# Altium PCB GCM_PCB.PcbDoc (part 2 of 2)
Units mm, origin at the board's own origin, x right, y up, seen from the top; angles counter-clockwise.
Board outline 98 x 97 mm, 4 copper layers (Top Layer, GND, Power and signals, Bottom Layer), stack 0.603 mm thick; 110 components, 82 nets, 466 pads, 160 vias.
Unrouted connection lines stored in the file: 67.
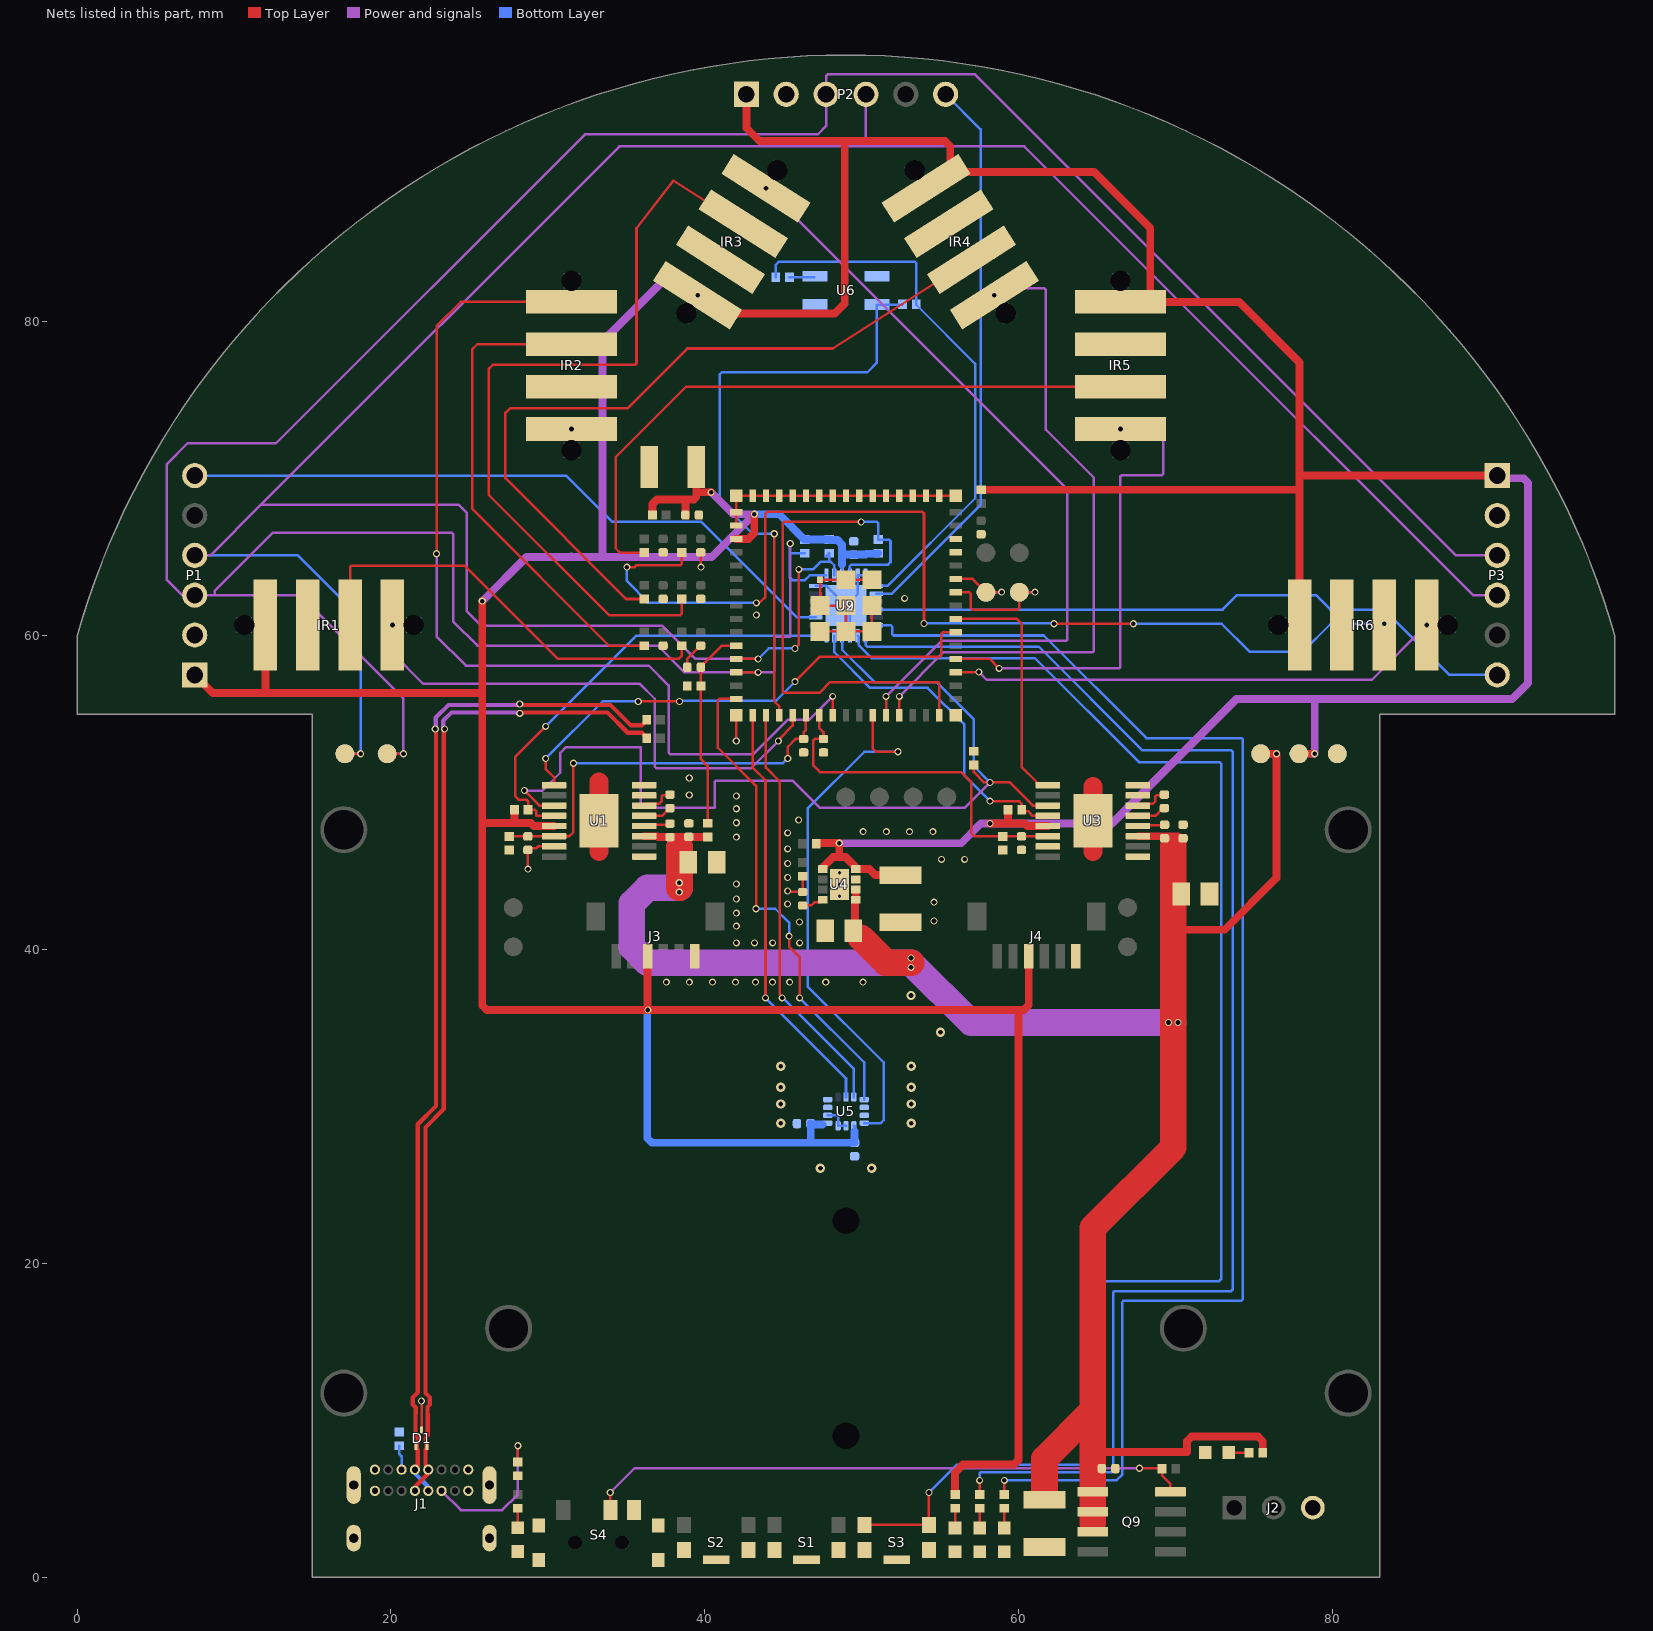
[diagram p4: the nets of this part, all layers, seen from the top]

## Via types
v1: diameter 0.45, hole 0.3, Top Layer to Bottom Layer, 148 vias
v2: diameter 0.6, hole 0.3, Top Layer to Bottom Layer, 12 vias

## Nets (pads, with @x,y where several pads share a name; then routed paths per layer and width w, separated by ;. In a path a pad name is that pad's centre, name@x,y a point inside that pad or via, vN(x,y) a via of type N, cw(c..) or ccw(c..) an arc to the next point about the centre after c; other vN are vias at no path point) (continued)
GND: ?.1@80.306,52.477 C2.1 C3.2 C4.1 C5.1 C6.1 C7.2 C10.2 C11.2 C12.2 C15.2 C16.2 C17.2 C18.2 C19.2 C21.2 C22.2 C23.1 C24.2 C25.2 C26.1 C27.1 C28.2 C30.2 C31.2 C36.2 C37.2 D1.3 D2.C D3.C D4.C D11.C D12.C IR1.2 IR2.2 IR3.2 IR4.2 IR5.2 IR6.2 J1.A1 J1.A12 J1.B1 J1.B12 J1.S1 J1.S2 J1.S3 J1.S4 J2.3 J3.6 J4.6 P1.2 P2.2 P3.2 R2.2 R3.2 R4.2 R12.2 R16.1 R20.2 R28.2 S1.1 S1.4 S1.5 S2.1 S2.4 S2.5 S3.1 S3.4 S3.5 S4.3 S4.4_1 S4.4_2 S4.4_3 S4.4_4 U1.7 U1.9 U1.15 U1.16 U1.17 U2.1 U2.2 U2.42 U2.43 U2.46 U2.47 U2.48 U2.49 U2.50 U2.51 U2.52 U2.53 U2.54 U2.55 U2.56 U2.57 U2.58 U2.59 U2.60 U2.61 U2.61_1 U2.61_2 U2.61_3 U2.61_4 U2.61_5 U2.61_6 U2.61_7 U2.61_8 U2.62 U2.63 U2.64 U2.65 U3.7 U3.9 U3.15 U3.16 U3.17 U4.3 U4.9 U4.10 U4.11 U4.12 U5.2 U5.3 U5.6 U5.7 U5.9 U5.10 U5.11 U6.2 U6.4 U9.9 U9.18 U9.23 U9.24 U9.25 | length 58
  Top Layer w0.16: v1(21.936,11.227) 21.956,11.207 D1.3@21.956,9.392 ; v1(28.74,45.12) 28.734,45.126 28.734,46.342 C36.2@28.729,46.347 28.843,46.461 29.269,46.461 29.38,46.572 U1.7@30.399,46.572 ; C11.2@38.891,57.996 38.891,58.537 39.716,59.362 C10.2@39.746,59.362 ; C19.2@39.746,65.307 39.751,65.302 39.751,64.372 v1(39.756,64.367) ; U2.63@42,54.917 42.006,54.911 v1(42.006,53.287) ; U2.2@42,67.017 U2.1@42,67.867 U2.62@42,68.917 U2.60@43.05,68.917 U2.59@43.9,68.917 U2.58@44.75,68.917 U2.57@45.6,68.917 U2.56@46.45,68.917 U2.55@47.3,68.917 U2.54@48.15,68.917 U2.53@49,68.917 U2.52@49.85,68.917 U2.51@50.7,68.917 U2.50@51.55,68.917 U2.49@52.4,68.917 U2.48@53.25,68.917 U2.47@54.1,68.917 U2.46@54.95,68.917 U2.65@56,68.917 ; v1(45.286,43.727) 45.316,43.697 46.216,43.697 C25.2@46.246,43.667 46.246,44.673 R20.2@46.25,44.677 ; U2.61_7@47.35,60.267 U2.61_6@49,60.267 ; U2.61_4@50.65,61.917 U2.61_5@50.65,60.267 U2.61_6@49,60.267 ; U2.61_3@50.65,63.567 U2.61_2@49,63.567 U2.61_1@47.35,63.567 U2.61_8@47.35,61.917 U2.61@49,61.917 U2.61_6@49,60.267 ; 64.65,50.46 64.731,50.379
  Top Layer w1.2: 33.269,46.243 33.269,50.697 ; 64.731,46.243 64.731,50.379
  Bottom Layer w0.16: U9.18@47.065,63.167 47.75,63.167 U9.25@49,61.917 ; U5.9@47.835,29.437 48.406,29.437 48.5,29.344 U5.7@48.5,28.772 U5.6@49,28.772 ; U9.9@49.25,59.982 49.25,61.667 U9.25@49,61.917 ; U9.24@50.25,63.852 U9.23@49.75,63.852 49.75,62.667 U9.25@49,61.917 ; v1@52.73,62.38 v1(52.74,62.38)
  other v1: 37.55,37.92 39.02,37.92 40.49,37.92 41.96,37.92 43.23,37.92 44.32,37.92 45.41,37.92 47.71,37.92 50.08,37.92 42.01,40.43 43.17,40.43 44.33,40.43 46.046,40.43 42.01,41.49 46.04,41.76 54.61,41.82 42.01,42.32 45.286,42.907 54.61,43.02 42.01,43.22 42.01,44.18 45.286,44.592 45.286,45.488 55.09,45.75 56.56,45.75 45.286,46.417 42.01,47.164 45.286,47.434 50.09,47.51 51.57,47.51 53.05,47.51 54.53,47.51 42.01,48.08 45.98,48.26 42.01,48.97 42.01,49.79 39.01,49.85 39.01,50.93 43.29,61.32
  other v2: 47.37,26.06 50.63,26.06 44.835,28.937 53.165,28.937 44.835,30.157 53.165,30.157 44.835,31.227 53.165,31.227 44.835,32.557 53.165,32.557 55.02,34.73 53.14,37.07
"GPIO 1": R13.2 U9.7 | length 90
  Top Layer w0.16: v1(57.516,6.18) 57.516,5.274 R13.2@57.52,5.27
  Bottom Layer w0.16: U9.7@50.25,59.982 50.25,59.396 50.344,59.302 61.281,59.302 67.872,52.711 73.546,52.711 73.64,52.618 73.64,18.334 73.546,18.24 66.11,18.24 66.017,18.146 66.017,6.794 65.923,6.7 57.61,6.7 57.516,6.606 v1(57.516,6.18)
"GPIO 2": R14.2 U9.6 | length 89.6
  Top Layer w0.16: v1(59.09,6.18) 59.09,5.274 R14.2@59.094,5.27
  Bottom Layer w0.16: U9.6@50.935,60.667 51.851,60.667 51.945,60.574 51.945,60.105 52.039,60.012 61.602,60.012 68.146,53.467 74.196,53.467 74.29,53.374 74.29,17.714 74.196,17.62 66.683,17.62 66.589,17.526 66.589,6.522 66.247,6.18 v1(59.09,6.18)
INT: R26.2 U2.30 U9.22 | length 35.7
  Top Layer w0.16: v1(49.969,67.246) 45.06,67.246 44.966,67.153 44.966,56.451 45.06,56.357 47.299,56.357 47.982,57.04 54.856,57.04 54.95,56.946 U2.30@54.95,54.917
  Bottom Layer w0.16: U9.22@49.25,63.852 49.25,64.439 49.344,64.532 51.681,64.532 51.836,64.687 51.836,66.029 51.742,66.122 R26.2@51.056,66.122 51.056,67.153 50.962,67.246 v1(49.969,67.246)
"INT1 IMU": U2.25 U5.4 | length 34.3
  Top Layer w0.16: U2.25@50.7,54.917 50.7,52.811 50.908,52.602 v1(52.32,52.602)
  Bottom Layer w0.16: U5.4@50.165,28.937 51.218,28.937 51.407,29.126 51.407,32.802 46.553,37.656 46.553,48.982 50.161,52.59 52.29,52.59 v1@52.32,52.56
"IPROPI M1": C17.1 C36.1 R4.1 U1.6 U2.20 | length 25.9
  Top Layer w0.16: R4.1@27.529,47.212 29.266,47.212 29.269,47.215 30.391,47.215 U1.6@30.399,47.222 31.379,47.222 31.63,47.473 v1(31.63,51.87) ; v1(45.287,52.173) 45.287,52.919 45.785,53.417 C17.1@46.296,53.417 46.296,53.837 46.45,53.991 U2.20@46.45,54.917
  Bottom Layer w0.16: v1(31.63,51.87) 31.64,51.86 44.943,51.86 45.256,52.173 v1(45.287,52.173)
"IPROPI M2": C18.1 C37.1 R12.1 U2.21 U3.6 | length 22.6
  Top Layer w0.16: U2.21@47.3,54.917 47.3,54.103 47.566,53.837 C18.1@47.566,53.417 47.022,53.417 46.928,53.324 46.928,51.716 47.338,51.306 56.331,51.306 56.971,50.666 56.971,47.412 57.171,47.212 R12.1@58.983,47.212 ; R12.1@58.968,47.207 C37.1@60.183,47.207 60.19,47.215 61.853,47.215 U3.6@61.861,47.222
"IR1 FLOOR": R22.1 U2.18 U6.3 | length 39.8
  Top Layer w0.16: v1(44.426,66.497) 44.426,55.807 44.75,55.483 U2.18@44.75,54.917
  Bottom Layer w0.16: v1(44.426,66.497) 43.046,66.497 40.95,68.593 40.95,76.63 41.107,76.787 50.367,76.787 50.975,77.395 U6.3@50.975,81.1 52.599,81.1 R22.1@52.606,81.107
"IR 1": IR1.3 R5.1 | length 26.1
  Top Layer w0.16: IR1.3@17.4,62.58 17.4,64.366 17.494,64.46 24.7,64.46 30.62,58.54 38.353,58.54 38.546,58.733 R5.1@38.546,59.357
"IR 2": IR2.3 R10.1 | length 33.1
  Top Layer w0.16: IR2.3@33.41,78.57 29.61,78.57 25.5,78.57 25.17,78.24 25.17,68.094 33.907,59.357 R10.1@36.146,59.357
"IR 3": IR3.3 R17.1 | length 53.6
  Top Layer w0.16: R17.1@38.546,62.343 38.546,61.401 38.452,61.307 33.903,61.307 26.23,68.98 26.23,77 26.49,77.26 35.556,77.26 35.65,77.354 35.65,85.969 38.001,89.003 40.035,87.707 40.599,87.399 40.844,87.265 41.62,86.77 43.273,85.717 IR3.3@44.049,85.223
"IR 4": IR4.3 R18.1 | length 51.2
  Top Layer w0.16: R18.1@36.146,62.338 34.994,62.338 27.29,70.042 27.29,74.19 27.59,74.49 35.08,74.49 38.89,78.3 48.147,78.3 54.636,82.434 55.401,82.946 56.177,83.44 57.83,84.493 IR4.3@58.606,84.987
"IR 5": IR5.3 R54.1 | length 43.7
  Top Layer w0.16: R54.1@36.146,65.297 34.605,65.297 34.33,65.572 34.33,71.38 38.82,75.87 64.59,75.87 IR5.3@68.39,75.87
"IR 6": IR6.3 R55.1 | length 71.7
  Top Layer w0.16: v1@35.106,64.367 35.528,64.367 35.661,64.5 38.452,64.5 38.546,64.594 R55.1@38.546,65.297 ; 43.561,62.16 43.84,62.439 43.84,67.764 43.987,67.91 53.853,67.91 53.97,67.794 v1(53.97,60.78) ; v1(62.26,60.76) v1@67.3,60.76 ; v1@67.301,60.759 v1(67.306,60.76) ; IR6.3@83.3,58.78 v1(83.3,60.76) IR6.3@83.3,62.58
  Bottom Layer w0.16: v1(35.031,64.367) 35.031,63.492 36.428,62.095 v1(43.29,62.095) ; v1@54.02,60.73 v1(53.97,60.78) 62.24,60.78 v1(62.26,60.76) ; v1(67.306,60.76) v1@67.346,60.72 ; v1(67.306,60.76) 72.941,60.76 74.737,58.964 78.094,58.964 79.89,60.76 v1(83.3,60.76) ; v1@83.26,60.72 v1@83.3,60.68
NetC1_1: C1.1 U1.13 | length 1.9
  Top Layer w0.16: U1.13@36.139,48.522 37.264,48.522 37.756,49.014 C1.1@37.786,49.014
NetC1_2: C1.2 U1.14 | length 2.1
  Top Layer w0.16: U1.14@36.139,49.172 36.264,49.297 37.099,49.297 37.246,49.444 37.246,49.753 37.34,49.847 37.759,49.847 C1.2@37.786,49.874
NetC13_1: C13.1 U3.13 | length 1.9
  Top Layer w0.16: U3.13@67.601,48.522 68.726,48.522 69.218,49.014 C13.1@69.248,49.014
NetC13_2: C13.2 U3.14 | length 2.1
  Top Layer w0.16: U3.14@67.601,49.172 67.726,49.297 68.561,49.297 68.708,49.444 68.708,49.753 68.802,49.847 69.221,49.847 C13.2@69.248,49.874
  Top Layer w0.254: C13.2@69.275,49.863 C13.2@69.286,49.874
NetC25_1: C25.1 U4.8 | length 1.4
  Top Layer w0.16: C25.1@46.246,42.807 46.786,42.807 46.986,43.007 47.361,43.007 U4.8@47.526,43.172
NetD2_A: D2.A R11.1 | length 1.3
  Top Layer w0.16: D2.A@55.946,3.14 55.95,3.144 R11.1@55.95,4.4
NetD3_A: D3.A R13.1 | length 1.2
  Top Layer w0.16: D3.A@57.476,3.184 D3.A@57.52,3.14 R13.1@57.52,4.309
NetD4_A: D4.A R14.1 | length 1.3
  Top Layer w0.16: D4.A@59.094,3.14 R14.1@59.094,4.4
NetD11_A: D11.A R56.1 | length 1.3
  Top Layer w0.16: R56.1@28.08,4.4 D11.A@28.08,3.143 D11.A@28.083,3.14
NetD12_A: D12.A R57.1 | length 1.3
  Top Layer w0.16: D12.A@73.4,7.95 73.404,7.946 R57.1@74.688,7.946
NetJ1_A5: J1.A5 R2.1 | length 1.6
  Bottom Layer w0.16: R2.1@20.536,8.382 20.536,7.852 20.681,7.707 J1.A5@20.681,6.857
NetJ1_B5: J1.B5 R3.1 | length 9.9
  Top Layer w0.16: R3.1@28.08,7.34 28.09,7.35 v1(28.09,8.38)
  Power and signals w0.16: J1.B5@23.231,5.507 24.461,4.277 27.088,4.277 28.09,5.28 v1(28.09,8.38)
NetQ9_4: Q9.4 R25.1 S4.2 | length 39
  Top Layer w0.16: v1(33.976,5.397) 33.976,3.965 S4.2@33.983,3.958 ; v1(67.696,6.947) 69.121,6.947 R25.1@69.141,6.928 69.141,6.473 69.671,5.943 Q9.4@69.671,5.442
  Power and signals w0.16: v1(33.976,5.397) 35.526,6.947 v1(67.696,6.947)
NetR21_1: R21.1 U6.1 | length 1.6
  Bottom Layer w0.16: R21.1@45.391,82.847 U6.1@46.972,82.847
"NFAULT M1": R9.1 U1.4 U9.12 | length 29
  Top Layer w0.16: v1(29.862,54.221) 27.918,52.277 27.918,49.794 28.175,49.537 28.647,49.537 28.741,49.444 R9.1@28.741,48.897 29.177,48.897 29.271,48.804 29.271,48.522 U1.4@30.399,48.522
  Bottom Layer w0.16: v1(29.862,54.221) 35.623,59.982 U9.12@47.75,59.982
"NFAULT M2": R15.1 U3.4 U9.11 | length 21.1
  Top Layer w0.16: v1(58.181,49.456) 60.023,49.456 60.193,49.286 R15.1@60.193,48.897 60.29,48.801 60.619,48.801 60.898,48.522 U3.4@61.861,48.522
  Bottom Layer w0.16: U9.11@48.25,59.982 48.25,58.956 50.529,56.677 54.204,56.677 56.546,54.336 56.546,51.091 v1(58.181,49.456)
NSLEEP: R16.2 U1.3 U3.3 U9.10 | length 62.3
  Top Layer w0.16: v1(28.502,50.133) 29.463,49.172 U1.3@30.399,49.172 ; R16.2@57.148,51.764 57.148,51.305 57.803,50.649 v1(58.181,50.649) ; v1@58.196,50.649 59.438,50.649 60.915,49.172 U3.3@61.861,49.172
  Power and signals w0.16: v1(28.502,50.133) 29.657,50.133 30.791,51.267 30.791,52.533 31.16,52.902 35.925,52.902 35.925,49.155 36.05,49.03 40.631,49.03 40.631,50.677 40.725,50.771 45.593,50.771 47.334,49.03 56.562,49.03 v1(58.181,50.649)
  Bottom Layer w0.16: U9.10@48.75,59.982 48.75,59.103 50.815,57.037 54.773,57.037 57.148,54.662 57.148,51.682 v1(58.181,50.649)
"ON/OFF IR 1": IR1.4 U2.19 | length 34.6
  Top Layer w0.16: v1@44.69,53.36 45.6,54.27 U2.19@45.6,54.917
  Power and signals w0.16: v1(20.1,60.68) 20.1,58.888 22.061,56.927 35.866,56.927 36.813,55.98 36.813,51.654 36.906,51.56 42.963,51.56 v1(44.69,53.287)
"ON/OFF IR 2": IR2.4 U2.22 | length 64.5
  Top Layer w0.16: v1(22.91,65.22) 22.91,79.73 24.45,81.27 29.61,81.27 IR2.4@33.41,81.27 ; U2.22@48.15,54.917 v1@48.15,56.1
  Power and signals w0.16: v1(22.91,65.22) 22.91,59.96 24.773,58.097 36.433,58.097 37.7,56.83 37.7,52.544 37.794,52.45 43.095,52.45 45.275,54.63 46.643,54.63 v1(48.15,56.137)
"ON/OFF IR 3": IR3.4 U2.26 | length 54.8
  Top Layer w0.16: IR3.4@42.295,89.542 43.071,89.047 v1(43.898,88.521) 44.724,87.994 IR3.4@45.5,87.5 ; U2.26@51.55,54.917 v1(51.55,56.137)
  Power and signals w0.16: v1(43.898,88.521) 63.11,69.308 63.11,59.764 63.016,59.67 55.083,59.67 v1(51.55,56.137)
"ON/OFF IR 4": IR4.4 U2.27 | length 46.4
  Top Layer w0.16: U2.27@52.4,54.917 v1(52.4,56.137) ; IR4.4@56.852,80.669 57.628,81.163 v1(58.455,81.689) 59.281,82.216 IR4.4@60.057,82.71
  Power and signals w0.16: v1(52.4,56.137) 55.193,58.93 64.706,58.93 64.8,59.024 64.8,70.064 61.73,73.134 61.73,82.034 61.636,82.128 58.893,82.128 v1(58.455,81.689)
"ON/OFF IR 5": IR5.4 U2.34 | length 35
  Top Layer w0.16: U2.34@56,58.517 58.163,58.517 v1(58.76,57.92) ; IR5.4@64.59,73.17 v1(66.49,73.17) IR5.4@68.39,73.17
  Power and signals w0.16: v1(58.76,57.92) 66.396,57.92 66.49,58.014 66.49,70.148 66.575,70.233 69.128,70.233 69.222,70.327 69.222,73.076 69.128,73.17 v1(66.49,73.17)
"ON/OFF IR 6": IR6.4 U2.33 | length 35.4
  Top Layer w0.16: U2.33@56,57.667 57.417,57.667 v1@57.43,57.68 ; IR6.4@86,58.78 v1(86,60.68) IR6.4@86,62.58
  Power and signals w0.16: v1(57.468,57.68) 57.968,57.18 82.5,57.18 v1(86,60.68)
"ON/OFF IR FLOOR": R21.2 R22.2 U9.1 | length 35
  Bottom Layer w0.16: R21.2@44.521,82.847 44.521,83.631 44.726,83.836 53.382,83.836 53.476,83.742 R22.2@53.476,81.107 53.476,81.087 57.238,77.325 57.238,68.758 51.647,63.167 U9.1@50.935,63.167
"PWM M1": U1.1 U2.36 | length 32.2
  Top Layer w0.16: v1(29.862,52.173) 29.862,51.517 30.399,50.98 U1.1@30.399,50.472 ; v1@35.763,55.86 35.794,55.829 38.371,55.829 v1(38.39,55.81) ; v1(45.756,57.067) 47.353,58.664 54.989,58.664 55.083,58.758 55.083,60.124 55.176,60.217 U2.36@56,60.217
  Bottom Layer w0.16: v1(29.862,52.173) 33.499,55.81 v1(35.763,55.81) ; v1(38.39,55.81) 38.445,55.866 44.554,55.866 45.736,57.047 v1@45.736,57.067
"PWM M2": U2.37 U3.1 | length 15.6
  Top Layer w0.16: U2.37@56,61.067 59.893,61.067 60.19,60.77 60.19,51.63 61.156,50.664 61.156,50.597 61.281,50.472 U3.1@61.861,50.472
RX: ?.1@57.92,62.77 U2.40 | length 4.3
  Top Layer w0.16: U2.40@56,63.617 57.073,63.617 ?.1@57.92,62.77 v1(58.92,62.77)
  Bottom Layer w0.16: ?.1@57.92,62.77 v1(58.92,62.77)
SCL: ?.1@19.76,52.477 P1.3 P2.3 P3.3 R27.2 U2.13 U9.19 | length 201.5
  Top Layer w0.16: ?.1@19.76,52.477 v1(20.8,52.477) ; U2.13@42,57.667 v1@43.396,57.667
  Power and signals w0.16: v1(20.8,52.477) 20.8,55.99 14.21,62.58 8.77,62.58 ; v1(45.446,65.877) 45.446,59.923 45.451,59.917 44.426,59.917 44.426,57.761 44.332,57.667 v1(43.406,57.667) 38.7,57.667 37.005,59.362 25.508,59.362 23.97,60.9 23.97,66.476 23.876,66.57 12.49,66.57 8.77,62.85 8.77,62.58 ; P3.3@90.5,65.12 87.88,65.12 57.23,95.77 47.824,95.77 47.73,95.676 P2.3@47.73,94.5 47.73,92.48 47.2,91.95 32.36,91.95 12.67,72.26 7.051,72.26 5.729,70.938 5.729,63.541 6.69,62.58 8.77,62.58
  Bottom Layer w0.16: ?.1@19.76,52.477 v1(20.8,52.477) ; v1(45.446,65.877) 45.426,65.857 45.426,65.252 ; R27.2@46.376,65.252 45.426,65.252 ; U9.19@47.75,63.852 46.701,63.852 46.385,63.536 45.587,63.536 45.426,63.697 45.426,65.252
SCLK: U2.16 U5.13 | length 26.8
  Top Layer w0.16: U2.16@43.05,54.917 43.05,51.61 43.87,50.79 v1(43.87,36.92)
  Bottom Layer w0.16: v1(43.87,36.92) 49,31.79 U5.13@49,30.602
SDA: ?.1@17.07,52.477 P1.4 P2.4 P3.4 R30.1 U2.12 U9.20 | length 184.5
  Top Layer w0.16: ?.1@17.07,52.477 v1(18.07,52.477) ; U2.12@42,58.517 v1(43.406,58.517) ; v1(45.756,59.187) 45.756,59.211 45.996,59.451 v1(45.996,64.227)
  Power and signals w0.16: P1.4@7.5,65.12 8.5,65.12 11.73,68.35 ; v1(43.406,58.517) 39.406,58.517 37.281,60.642 25.748,60.642 24.84,61.55 24.84,67.81 24.3,68.35 11.73,68.35 ; P2.4@50.27,94.5 50.27,91.196 50.286,91.18 ; P3.4@90.5,62.58 88.957,62.58 68.707,82.83 60.357,91.18 50.286,91.18 ; 11.73,68.35 34.56,91.18 50.286,91.18
  Bottom Layer w0.16: P1.4@7.5,65.12 14.07,65.12 18.07,61.12 v1(18.07,52.477) ?.1@17.07,52.477 ; v1(43.406,58.517) 44.076,59.187 v1(45.756,59.187) ; v1(45.996,64.227) 46.906,64.227 46.922,64.243 46.927,64.243 47.406,64.722 47.936,64.722 ; R30.1@47.716,65.052 47.916,65.252 R30.1@47.936,65.252 47.936,64.722 ; U9.20@48.25,63.852 48.25,64.49 48.018,64.722 47.936,64.722
SDI: U2.17 U5.14 | length 26.6
  Top Layer w0.16: U2.17@43.9,54.917 43.9,53.42 43.897,53.417 43.897,51.595 44.78,50.712 44.78,37.15 44.931,36.998 v1(44.931,36.92)
  Bottom Layer w0.16: v1@44.956,36.942 49.5,32.398 U5.14@49.5,30.602
SDO: U2.15 U5.1 | length 31.2
  Top Layer w0.16: U2.15@42,55.967 40.924,55.967 40.83,55.874 40.83,52.867 43.27,50.427 v1@43.27,42.6 ; v1(45.38,40.85) 45.38,40.2 46.05,39.53 v1(46.05,36.92)
  Bottom Layer w0.16: v1(43.26,42.6) 44.491,42.6 45.38,41.711 v1(45.38,40.85) ; v1(46.05,36.92) 50.165,32.805 U5.1@50.165,30.437
SWITCH: S3.2 S3.3 U9.8 | length 96.8
  Top Layer w0.16: S3.3@50.183,3.332 S3.2@54.283,3.332 v1(54.283,5.397)
  Bottom Layer w0.16: U9.8@49.75,59.982 49.805,59.927 49.805,59.403 50.633,58.575 61.028,58.575 67.665,51.938 72.806,51.938 72.9,51.845 72.9,19 72.77,18.87 65.538,18.87 65.444,18.776 65.444,7.274 65.351,7.18 56.066,7.18 v1(54.283,5.397)
TX: ?.1@60.05,62.77 U2.39 | length 8.1
  Top Layer w0.16: U2.39@56,62.767 56.856,62.767 56.95,62.674 56.95,61.761 57.044,61.667 59.956,61.667 60.05,61.761 ?.1@60.05,62.77 v1(61.05,62.77)
  Bottom Layer w0.16: ?.1@60.05,62.77 v1(61.05,62.77)
USB_N: D1.2 J1.A7 J1.B7 R7.1 | length 64.3
  Top Layer w0.27: J1.B7@21.531,5.507 21.6,5.576 21.6,5.83 22.312,6.542 22.312,6.788 J1.A7@22.381,6.857 22.381,6.954 22.203,7.133 22.203,8.119 22.261,8.177 22.261,8.307 D1.2@22.306,8.352 22.261,8.398 22.261,8.528 22.203,8.585 22.203,8.906 22.351,9.055 22.351,10.4 22.331,10.42 22.331,10.851 22.481,11.001 22.481,11.453 22.203,11.732 22.203,28.664 23.372,29.833 23.372,53.997 v1(23.425,54.05) ; v1(28.21,55.05) 28.244,55.084 28.441,55.084 28.47,55.113 33.794,55.113 35.093,53.814 35.996,53.814 R7.1@36.166,53.644
  Top Layer w0.291: R7.1@36.166,53.644 36.166,53.587 R7.1@36.301,53.452
  Power and signals w0.27: v1(23.425,54.05) 23.425,54.099 23.333,54.191 23.333,54.584 23.862,55.113 28.147,55.113 v1(28.21,55.05)
USB_P: D1.1 J1.A6 J1.B6 R8.1 | length 65.1
  Top Layer w0.27: J1.A6@21.531,6.857 21.531,6.954 21.709,7.133 21.709,8.119 21.651,8.177 21.651,8.307 D1.1@21.606,8.352 21.651,8.398 21.651,8.528 21.709,8.585 21.709,8.906 21.561,9.055 21.561,10.4 21.581,10.42 21.581,10.811 21.391,11.001 21.391,11.453 21.709,11.772 21.709,28.868 22.878,30.037 22.878,53.997 v1(22.825,54.05) ; v1(28.21,55.65) 28.244,55.616 28.441,55.616 28.47,55.587 33.99,55.587 35.292,54.285 35.996,54.285 R8.1@36.166,54.455
  Top Layer w0.291: R8.1@36.166,54.455 36.166,54.513 R8.1@36.301,54.647
  Power and signals w0.27: v1(22.825,54.05) 22.859,54.084 22.859,54.211 22.859,54.781 23.666,55.587 28.147,55.587 v1(28.21,55.65)
  Bottom Layer w0.27: J1.A6@21.531,6.857 21.6,6.788 21.6,6.542 22.312,5.83 22.312,5.576 J1.B6@22.381,5.507
"V METER": C11.1 R28.1 R29.1 U2.11 | length 13.2
  Top Layer w0.16: R28.1@39.751,56.791 39.751,52.139 40.186,51.704 R29.1@40.186,48.047 ; C11.1@39.751,57.996 39.751,56.801 R28.1@39.756,56.796 ; C11.1@39.751,58.026 41.092,59.367 U2.11@42,59.367
  Top Layer w0.254: R28.1@39.751,56.791 R28.1@39.756,56.796 ; C11.1@39.751,57.996 C11.1@39.751,58.026 ; U2.11@41.8,59.367 U2.11@42,59.367
"VCP M1": C8.1 U1.12 | length 1.7
  Top Layer w0.16: U1.12@36.139,47.872 36.216,47.95 37.708,47.95 C8.1@37.786,48.027
"VCP M2": C20.1 U3.12 | length 1.7
  Top Layer w0.16: U3.12@67.601,47.872 67.64,47.911 69.261,47.911 C20.1@69.3,47.95
VDDIO: ?.1@77.866,52.477 C3.1 C4.2 C22.1 C27.2 C28.1 C30.1 IR1.1 IR2.1 IR3.1 IR4.1 IR5.1 IR6.1 J3.3 J4.3 P1.1 P2.1 P3.1 R1.2 R6.2 R9.2 R11.2 R15.2 R19.1 R26.1 R27.1 R30.2 U1.5 U2.3 U3.5 U4.4 U4.5 U5.5 U5.8 U9.21 | length 436.5
  Top Layer w0.5: P1.1@7.5,57.5 8.66,56.34 11.996,56.34 ; IR1.1@12,60.68 12,56.344 11.996,56.34 ; v1(25.82,62.2) 25.82,56.34 ; R9.2@27.871,48.897 27.871,48.084 27.897,48.057 ; IR2.1@29.61,73.17 v1(31.51,73.17) IR2.1@33.41,73.17 ; U1.5@30.399,47.872 29.116,47.872 28.931,48.057 27.897,48.057 ; v1@36.356,36.164 J3.3@36.356,39.582 ; R6.2@36.668,67.688 36.668,68.39 36.961,68.683 38.726,68.683 ; IR3.1@37.943,82.71 38.576,82.307 v1(39.545,81.689) 40.515,81.072 41.148,80.669 41.282,80.534 48.284,80.534 48.92,81.17 48.92,91.513 ; C3.1@38.763,67.688 38.763,68.646 38.726,68.683 ; C4.2@39.455,70.747 39.455,69.147 ; v1(40.406,69.137) 39.464,69.137 39.455,69.147 ; U2.3@42,66.167 42.786,66.167 43.156,66.537 v1(43.156,67.737) ; P2.1@42.65,94.5 42.65,92.36 43.497,91.513 48.92,91.513 ; R19.1@47.101,46.737 47.101,46.75 47.131,46.78 v1(48.57,46.78) 48.57,45.903 48.576,45.897 ; U4.5@47.526,45.122 47.576,45.122 47.576,45.295 48.178,45.897 48.576,45.897 ; C27.2@52.476,44.746 50.868,44.746 50.492,45.122 U4.4@49.626,45.122 49.576,45.122 49.576,45.295 48.974,45.897 48.576,45.897 ; IR4.1@52.5,87.5 52.51,87.506 53.133,87.903 IR4.1@54.102,88.521 55.072,89.139 IR4.1@55.705,89.542 ; R11.2@55.95,5.27 55.95,6.67 56.46,7.18 59.697,7.18 59.99,7.473 59.99,36.15 ; R1.2@57.606,69.302 77.875,69.302 77.9,69.277 ; v1(58.181,48.037) 58.186,48.042 59.292,48.042 ; R15.2@59.323,48.897 59.323,48.073 59.292,48.042 ; 60.351,36.15 59.99,36.15 ; 60.351,36.176 60.644,36.469 60.644,37.369 J4.3@60.644,39.582 ; U3.5@61.861,47.872 60.57,47.872 60.4,48.042 59.292,48.042 ; IR5.1@64.59,81.27 IR5.1@66.49,81.27 IR5.1@68.39,81.27 ; ?.1@77.866,52.477 v1@78.836,52.477 ; IR6.1@77.9,58.78 IR6.1@77.9,60.68 77.9,69.277 ; P3.1@90.5,70.2 77.958,70.2 77.9,70.258 ; 11.996,56.34 25.82,56.34 ; 25.82,48.057 25.82,36.443 26.113,36.15 v1(36.37,36.15) 59.99,36.15 ; 25.82,48.057 25.82,56.34 ; 25.82,48.057 27.897,48.057 ; 38.726,68.683 39.306,68.683 39.455,68.832 39.455,69.147 ; 48.92,91.513 55.303,91.513 55.647,91.169 55.647,89.599 IR4.1@55.705,89.542 ; IR4.1@55.705,89.542 55.713,89.55 56.701,89.55 56.71,89.542 64.822,89.542 68.39,85.973 IR5.1@68.39,81.27 ; IR5.1@68.39,81.27 74.04,81.27 77.9,77.41 77.9,70.258 ; 77.9,69.277 77.9,70.258
  Power and signals w0.5: v1(25.82,62.2) 28.637,65.017 31.489,65.017 ; 31.51,65.038 31.489,65.017 ; v1(31.51,73.17) 33.485,73.17 ; v1(39.545,81.689) 37.721,82.981 33.485,78.745 33.485,73.17 ; v1(40.406,69.137) 41.806,67.737 v1(43.156,67.737) 40.436,65.017 33.485,65.017 ; v1(48.57,46.78) 48.573,46.777 56.336,46.777 57.596,48.037 v1(58.181,48.037) 65.956,48.037 73.879,55.96 78.866,55.96 ; v1(78.866,52.477) 78.866,55.96 ; P3.1@90.5,70.2 90.668,70.032 92.171,70.032 92.464,69.739 92.464,56.975 91.449,55.96 78.866,55.96 ; 31.489,65.017 33.485,65.017 ; 33.485,65.017 33.485,73.17
  Bottom Layer w0.16: U9.21@48.75,63.852 48.75,64.531 48.751,64.532 ; U5.5@49.5,28.772 49.546,28.726 49.546,28.397
  Bottom Layer w0.5: v1(36.37,36.15) 36.34,36.12 36.34,27.98 36.633,27.687 46.756,27.687 ; v1(43.156,67.737) 44.741,67.737 46.356,66.122 R27.1@46.376,66.122 R30.2@47.936,66.122 47.966,66.092 48.458,66.092 48.751,65.799 48.751,65.167 ; C22.1@46.736,28.907 46.756,28.887 C22.1@46.756,28.862 ; 46.756,27.709 C22.1@46.756,28.862 ; 46.778,27.687 C28.1@49.546,27.687 49.546,28.397 ; 47.5,28.862 C22.1@46.756,28.862 ; 48.751,64.532 48.751,65.167 ; C30.1@49.476,65.167 48.751,65.167 ; C30.1@49.516,65.167 50.246,65.167 50.301,65.222 51.026,65.222 R26.1@51.056,65.252 ; ?.1@77.866,52.477 v1@78.836,52.477
"VM M1": ?.1@75.426,52.477 C5.2 C6.2 C7.1 C8.2 C16.1 C20.2 C23.2 C26.2 C31.1 Q9.5 Q9.6 Q9.7 R29.2 R57.2 U1.11 U3.11 U4.1 U4.2 | length 144.1
  Top Layer w0.5: U1.11@36.139,47.222 36.994,47.222 37.039,47.177 C7.1@38.986,47.177 R29.2@40.186,47.177 ; U4.2@49.626,43.822 U4.1@49.626,43.172 49.576,43.172 49.576,41.302 C26.2@49.473,41.199 49.473,41.07 49.782,40.761 C26.2@49.947,40.761 ; 64.721,7.98 70.727,7.98 70.727,8.667 71.02,8.96 75.265,8.96 75.558,8.667 R57.2@75.558,7.946 ; U3.11@67.601,47.222 70.153,47.222 70.446,46.929 70.446,44.538 ; 69.856,41.26 73.128,41.26 76.426,44.557 v1(76.426,52.477) ?.1@75.426,52.477
  Top Layer w1.7: 38.394,43.937 38.394,46.545 ; C26.2@49.947,40.761 51.541,39.167 53.146,39.167 53.156,39.157 ; 61.636,5.487 61.646,5.497 61.646,7.547 64.721,10.622 ; 64.721,3.477 Q9.6@64.721,4.172 Q9.5@64.721,5.442 64.721,7.98 64.721,10.622 ; 69.856,46.597 69.856,41.26 69.856,27.397 64.721,22.262 64.721,10.622
  Power and signals w1.7: 38.394,43.937 36.352,43.937 35.356,42.941 35.356,40.153 36.352,39.157 53.156,39.157 56.963,35.35 v1(69.55,35.35) 69.85,35.35
  Bottom Layer w0.5: ?.1@75.426,52.477 v1@76.416,52.477
  other v1: 70.15,35.35 53.146,38.867 53.146,39.467 38.376,43.657 38.376,44.257
XSHUT1: P1.6 U9.14 | length 43.3
  Bottom Layer w0.16: P1.6@7.5,70.2 8.5,70.2 31.167,70.2 34.1,67.267 39.766,67.267 45.866,61.167 U9.14@47.065,61.167
XSHUT2: P2.6 U9.2 | length 36.1
  Bottom Layer w0.16: U9.2@50.935,62.667 51.911,62.667 57.584,68.34 57.584,92.266 P2.6@55.35,94.5
XSHUT3: P3.6 U9.4 | length 41.3
  Bottom Layer w0.16: U9.4@50.935,61.667 72.991,61.667 73.904,62.58 78.957,62.58 79.87,61.667 83.283,61.667 87.45,57.5 P3.6@89.784,57.5
pads on no net: IR1.13 IR2.13 IR3.13 IR4.13 IR5.13 IR6.13 J1.A8 J1.B8 J2.2 J3.S1 J3.S2 J4.S1 J4.S2 P1.5 P2.5 P3.5 Q9.8 S4. S4.1 U2.41 U2.44 U4.7 U9.3 U9.5 U9.13 U9.15 U9.16 U9.17

## Polygon pours and split planes (outlines as drawn)
GND on Top Layer "GND_L01_P000" (solid, remove dead copper, pour order 0): 0,55 15,55 15,0 83,0 83,55 98,55 98,60 ccw(c49,46.054) 0,60
GND on Bottom Layer "GND_L04_P001" (solid, remove dead copper, pour order 1): 0,55 15,55 15,0 83,0 83,55 98,55 98,60 ccw(c49,46.054) 0,60
GND on Power and signals "GND_L03_P002" (solid, remove dead copper, pour order 2): 0,55 15,55 15,0 83,0 83,55 98,55 98,60 ccw(c49,46.054) 0,60
GND on GND (split plane): 156 vertices, not listed, extent 0.51,0.51 97.49,96.492

## Other copper
Top Layer:
  pour cut-out: 41.3,74.692 56.7,74.692 56.7,69.642 41.3,69.642
Power and signals:
  pour cut-out: 41.3,74.692 56.7,74.692 56.7,69.642 41.3,69.642
Bottom Layer:
  pour cut-out: 41.3,74.692 56.7,74.692 56.7,69.642 41.3,69.642
GND (plane layer: these items are gaps in the copper):
  pour cut-out: 41.3,74.692 56.7,74.692 56.7,69.642 41.3,69.642

## Silkscreen, mask and mechanical layers (free items; w line width, h text height)
Top Overlay:
  drawing of 50 lines, arcs and shapes, not listed
  text "EN" at 57.39,63.621 h0.7
  text "BOOT" at 59.51,63.621 h0.7
  text "RX" at 57.394,61.104 h0.7
  text "TX" at 59.514,61.104 h0.7
  text "I2C" at 16.124,53.391 h1
  text "PWR" at 74.856,53.391 h1
  text "SDA" at 16.124,50.921 h0.7
  text "SCL" at 18.884,50.921 h0.7
  text "BAT" at 74.856,50.921 h0.7
  text "3V" at 77.32,50.921 h0.7
  text "GND" at 79.37,50.921 h0.7
  text "ENCODERS" at 48.54,50.694 h1
  text "1A" at 48.54,48.171 h0.7
  text "1B" at 50.618,48.171 h0.7
  text "2A" at 52.696,48.171 h0.7
  text "2B" at 54.89,48.171 h0.7
  text "MTR 1" at 29.434,43.116 h1 r270
  text "MTR 2" at 68.504,43.116 h1 r270
  text "M1" at 27.334,41.126 h0.7
  text "M1" at 66.474,41.126 h0.7
  text "M2" at 27.274,38.614 h0.7
  text "M2" at 66.414,38.614 h0.7
  text "OFF/ON" at 29.84,5.811 h1.3
  text "EN" at 39.564,4.494 h1.3
  text "BOOT" at 44.314,4.494 h1.3
  text "SW" at 51.064,4.494 h1.3
Bottom Overlay:
  drawing of 68 lines, arcs and shapes, not listed
  text "EN" at 58.552,63.621 h0.7
  text "BOOT" at 62.072,63.621 h0.7
  text "RX" at 58.556,61.114 h0.7
  text "TX" at 60.686,61.104 h0.7
  text "I2C" at 20.75,53.391 h1
  text "PWR" at 81.236,53.391 h1
  text "SDA" at 17.996,50.921 h0.7
  text "SCL" at 20.756,50.921 h0.7
  text "BAT" at 76.726,50.921 h0.7
  text "3V" at 78.482,50.921 h0.7
  text "GND" at 81.232,50.921 h0.7
  text "ENCODERS" at 56.062,50.694 h1
  text "1A" at 49.702,48.171 h0.7
  text "1B" at 51.552,48.171 h0.7
  text "2A" at 53.862,48.171 h0.7
  text "2B" at 56.062,48.171 h0.7
  text "M1" at 28.267,41.126 h0.7
  text "M1" at 67.407,41.126 h0.7
  text "MTR 1" at 29.434,38.784 h1 r270
  text "M2" at 28.44,38.614 h0.7
  text "M2" at 67.58,38.614 h0.7
  text "MTR 2" at 68.504,38.454 h1 r270
  text "Tomas S. Giomi" at 79.25,27.762 h1.2
  text "Felipe F. Crocco" at 80.03,26.182 h1.2
  text "2026" at 75.03,24.6 h1.2
  text "Micromouse" at 68.74,24.5 h1.2
  text "GCM V1" at 79,17.764 h2.72

## Text inside footprints (layer, text, board x,y; h text height)
IR1: Top Overlay "+" at 11.249,63.58 h1 r90
IR2: Top Overlay "+" at 28.61,72.419 h1 r180
IR3: Top Overlay "+" at 36.696,82.614 h1 r147.5
IR4: Top Overlay "+" at 56.145,90.713 h1 r32.5
IR5: Top Overlay "+" at 69.39,82.021 h1
IR6: Top Overlay "+" at 77.149,63.58 h1 r90